# Altium PCB Power_Ctrl_Board_PCB.PcbDoc (part 1 of 2)
Units mil, origin at the board's own origin, x right, y up, seen from the top; angles counter-clockwise.
Board outline 6299.21 x 3937.01 mil, 4 copper layers (Top Layer, GND, +12, Bottom Layer), stack 23.756 mil thick; 118 components, 80 nets, 423 pads, 36 vias.
Unrouted connection lines stored in the file: 206.
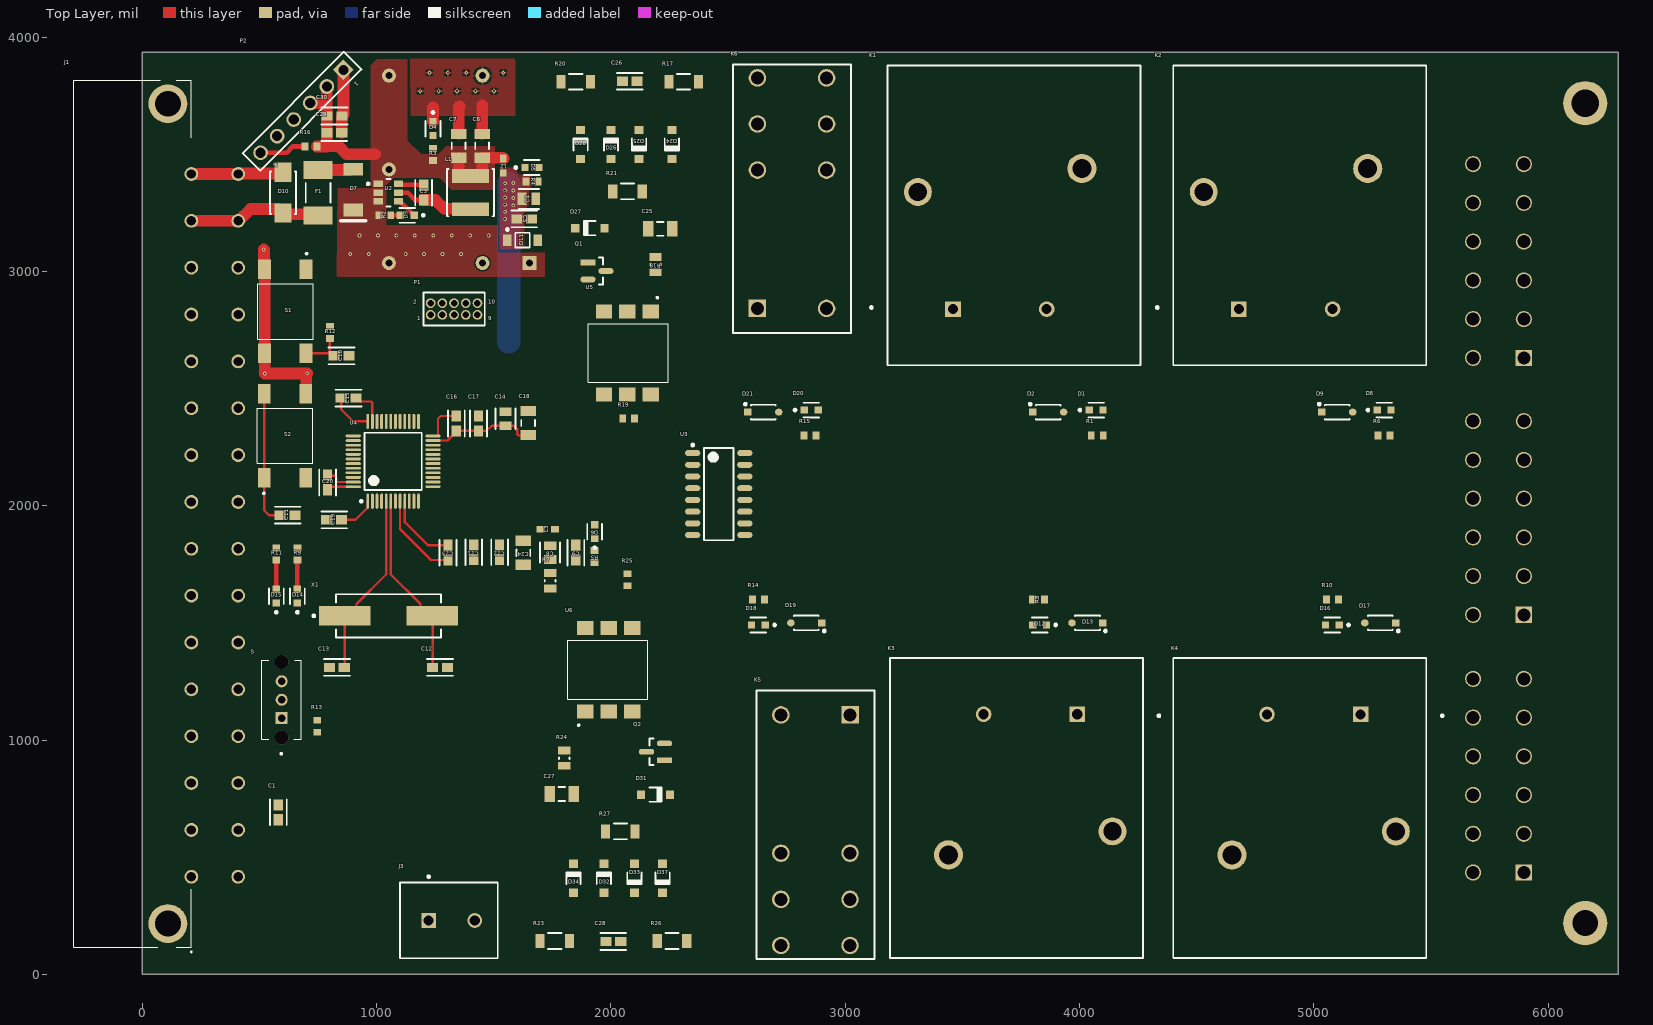
[diagram p0: Top Layer view]
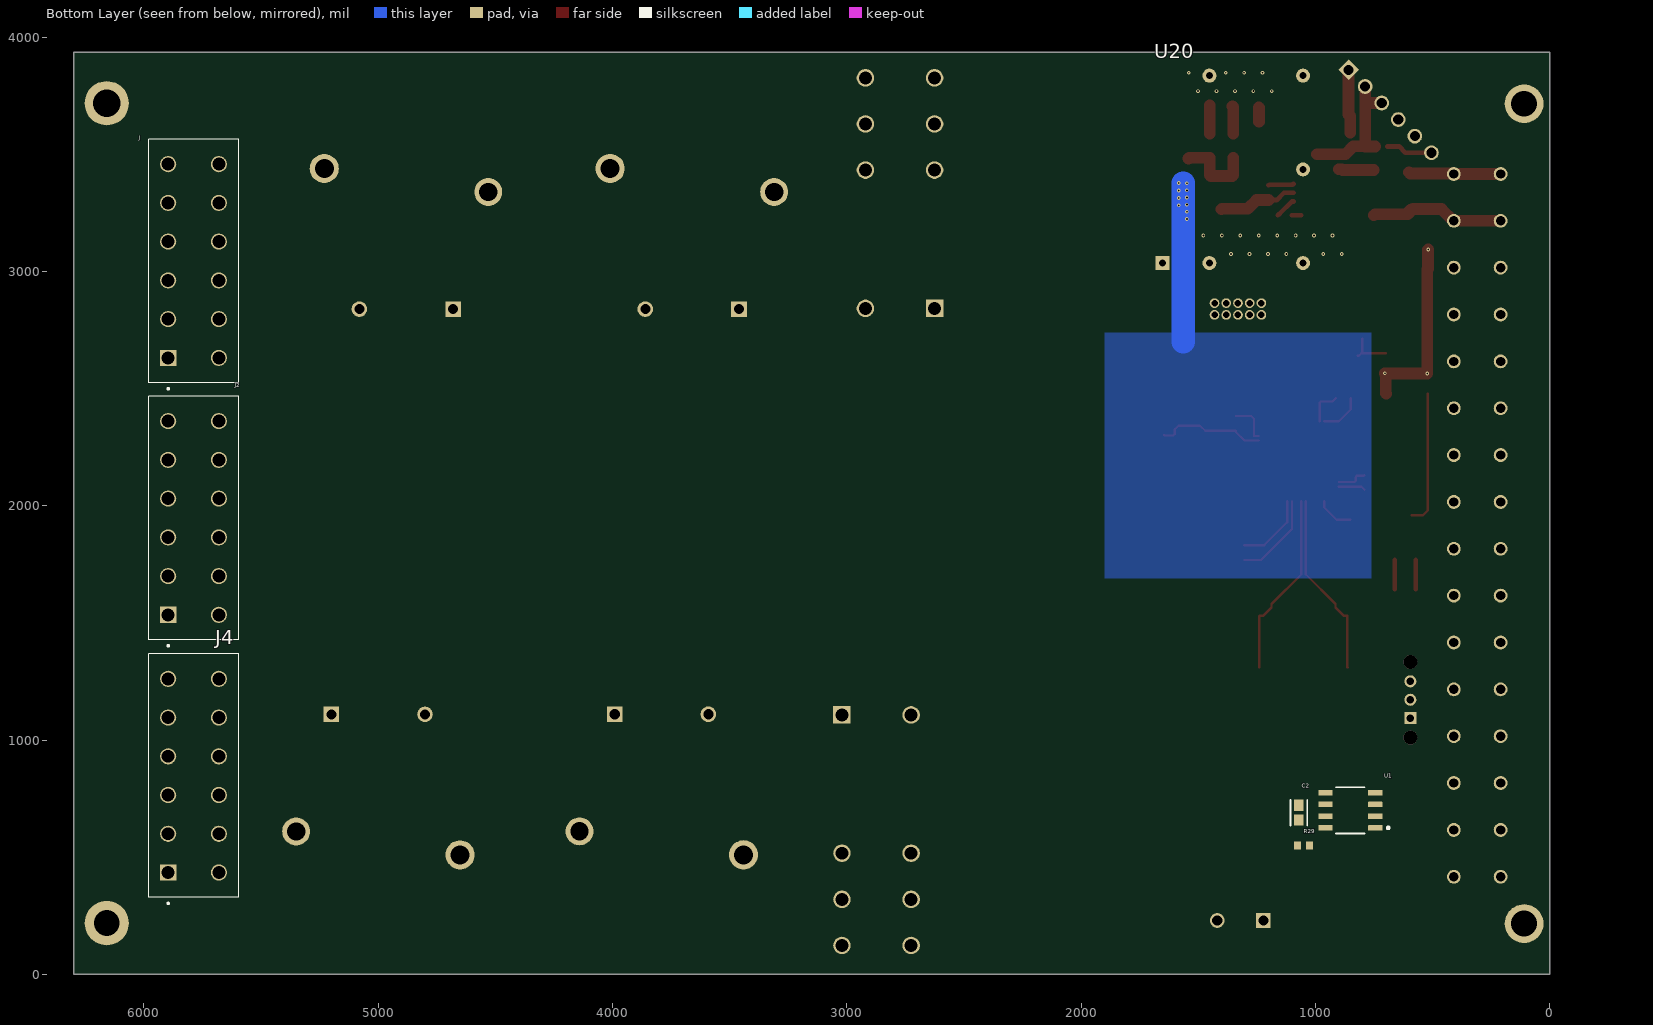
[diagram p1: Bottom Layer view, seen from below]
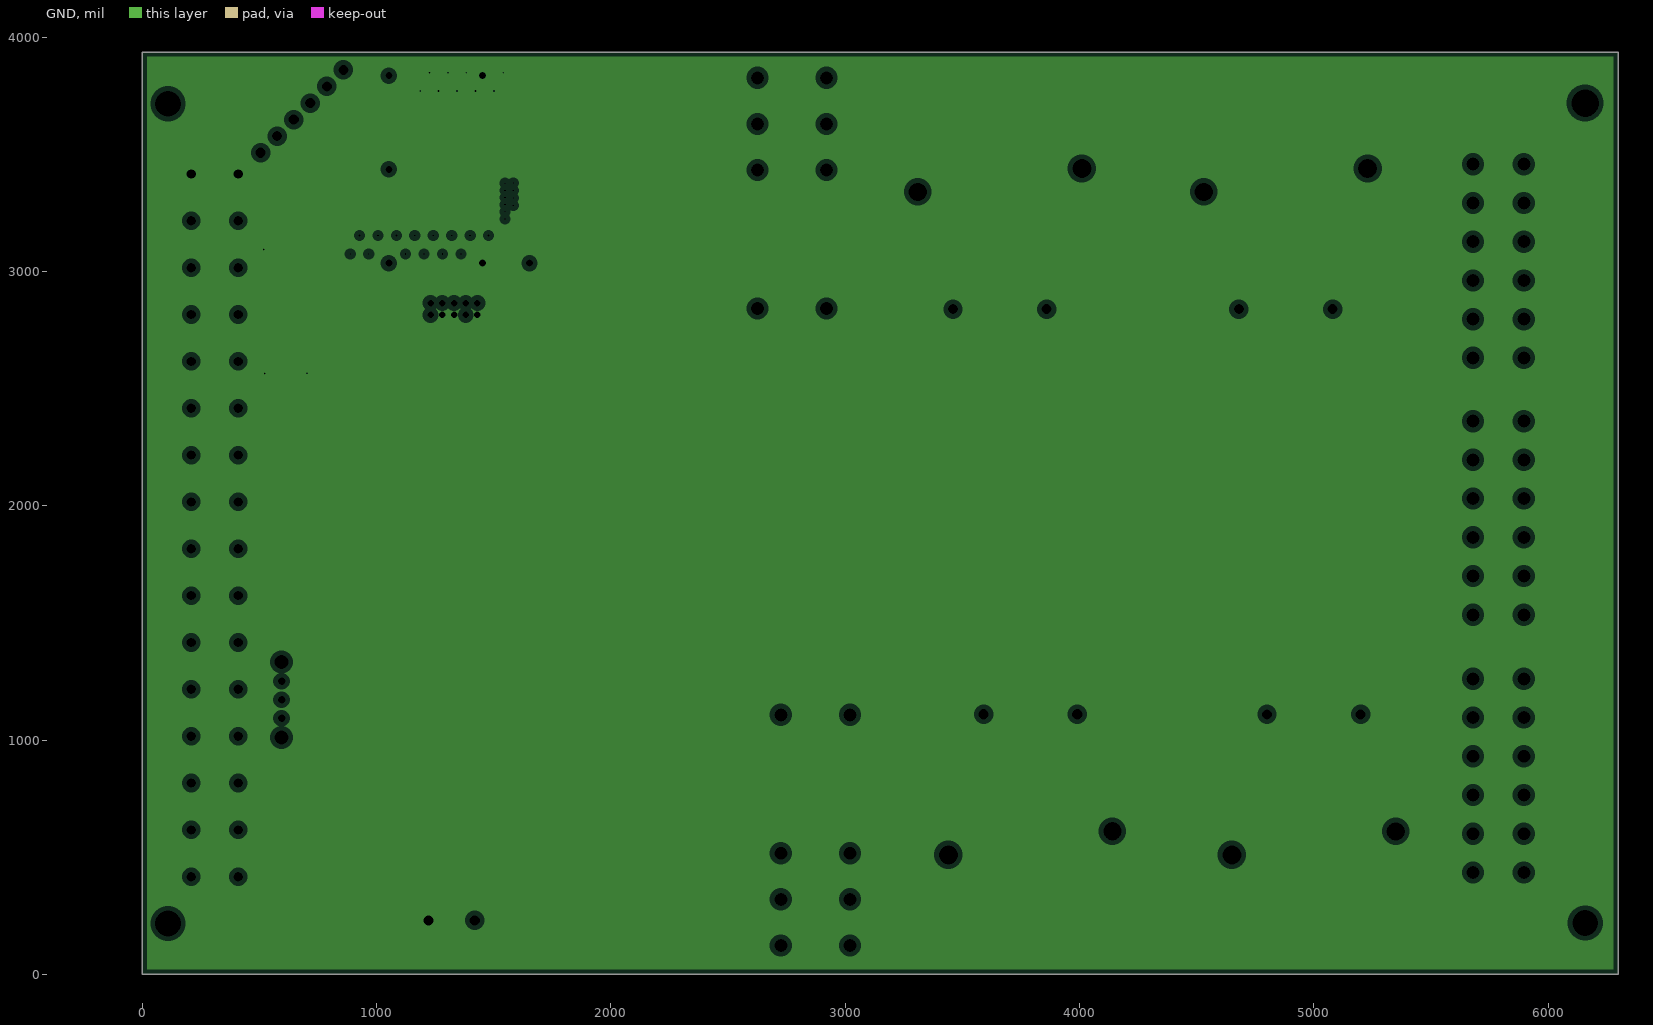
[diagram p2: GND, clearances drawn from the general rule]
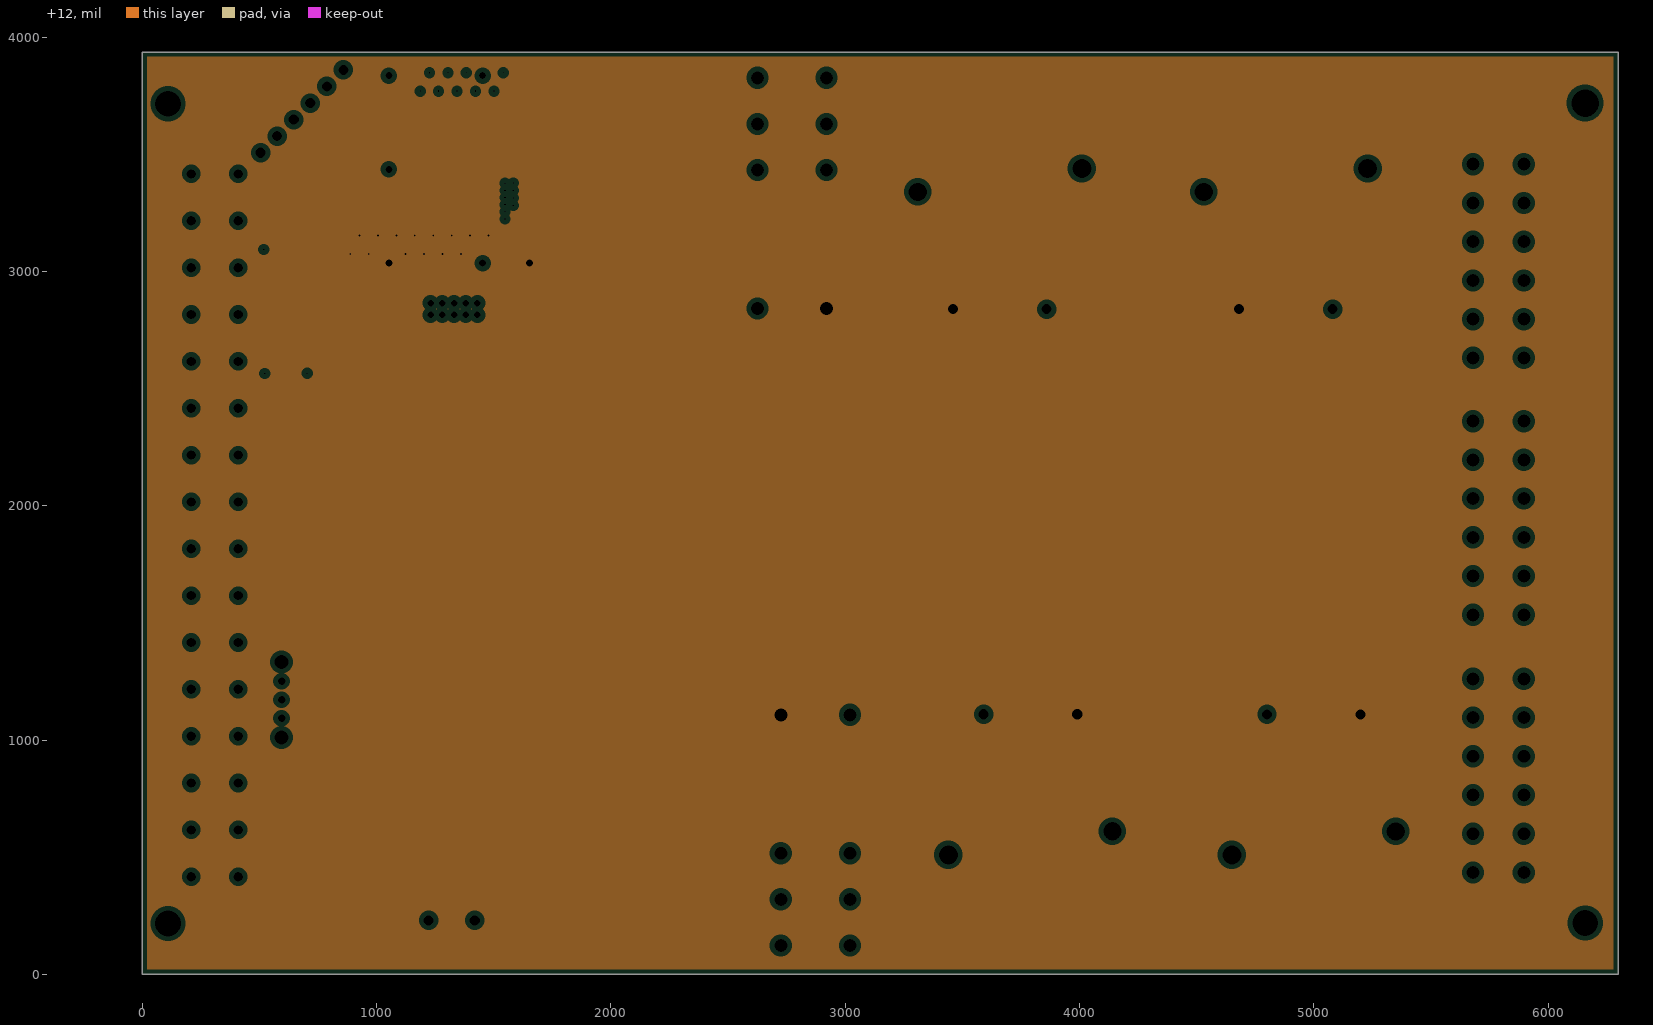
[diagram p3: +12, clearances drawn from the general rule]

## Layer stack, top to bottom
Top Solder: solder mask 0.4, Solder Resist, Dk 3.5
Top Layer: signal copper 1.4
Dielectric 2: prepreg 2.8, PP-006, Dk 4.1
GND: plane copper 1.378, net GND
Dielectric 1: dielectric 12.6, FR-4, Dk 4.8
+12: plane copper 1.378, net +12
Dielectric 3: prepreg 2.8, PP-006, Dk 4.1
Bottom Layer: signal copper 1.4
Bottom Solder: solder mask 0.4, Solder Resist, Dk 3.5

## Board outline
0,0 6299.21,0 6299.21,3937.01 0,3937.01

## Design rules (kind name [scope] priority, off if disabled: settings)
Clearance [All] p1: gap=5 ignorepadtopadclearanceinfootprint=TRUE
PlaneClearance [All] p1: clearance=20
PlaneConnect [All] p1: planeconnectstyle=Relief reliefexpansion=20 reliefentries=4 reliefconductorwidth=10 reliefairgap=10
PolygonConnect PolygonConnect_5 [All vs IsNamedPolygon('DVCC_L01_P005')] p1: connectstyle=Direct reliefconductorwidth=10 reliefentries=4 polygonreliefangle="90 Angle" airgapwidth=10
PolygonConnect PolygonConnect_4 [All vs IsNamedPolygon('+3.3_L01_P002')] p2: connectstyle=Direct reliefconductorwidth=10 reliefentries=4 polygonreliefangle="90 Angle" airgapwidth=10
PolygonConnect PolygonConnect_3 [All vs IsNamedPolygon('+12_L01_P000')] p3: connectstyle=Direct reliefconductorwidth=10 reliefentries=4 polygonreliefangle="90 Angle" airgapwidth=10
PolygonConnect PolygonConnect_2 [All vs IsNamedPolygon('+12_L01_P000')] p4: connectstyle=Relief reliefconductorwidth=10 reliefentries=4 polygonreliefangle="90 Angle" airgapwidth=10
PolygonConnect PolygonConnect_1 [All vs IsNamedPolygon('+12_L01_P000')] p5: connectstyle=Direct reliefconductorwidth=10 reliefentries=4 polygonreliefangle="90 Angle" airgapwidth=10
PolygonConnect [All] p6: connectstyle=Relief reliefconductorwidth=10 reliefentries=4 polygonreliefangle="90 Angle" airgapwidth=10
RoutingVias [All] p1: holewidth=7.87 width=15.75 viastyle="Through Hole" minholewidth=7.87 minwidth=15.75 maxholewidth=28 maxwidth=50
SilkToSilkClearance [All] p1 off: silktosilkclearance=10
SolderMaskExpansion [All] p1: expansion=4 istentingtop=FALSE
Width [All] p1: maxlimit=100 minlimit=6 preferedwidth=25 minimp=50.000000 maximp=50.000000 favimp=50.000000
27 further rules are at their usual default settings.

## Components (designator, comment, footprint, x,y, rotation, side; value= is the part's Value field where it differs from the comment)
C1 "GRM188R60J106ME47D" FP-GRM188-0_1-e0_2_0_55-IPC_A 580,691.57 r90 top
C2 "GRM188R60J106ME47D" FP-GRM188-0_1-e0_2_0_55-IPC_A 1070,690 r90 bottom
C3 "0.1uF, 50V, 0603, X7R" FP-GRM188-0_1-e0_2_0_55-IPC_A 1200,3336.61 r270 top
C4 "4.7uF, 50V, 0805, X5R" FP-C0805C-DG-MFG 1649.53,3310 r0 top value=10uF
C5 "0.1uF, 50V, 0603, X7R" FP-GRM188-0_1-e0_2_0_55-IPC_A 1629.6,3224.48 r0 top
C6 "22uF, 10V, 1206, X7R" AVX-1206-2_L 1450,3536.61 r270 top
C7 "22uF, 10V, 1206, X7R" AVX-1206-2_L 1350,3536.61 r270 top
C8 "4.7uF, 50V, 0805, X5R" FP-C0805C-DG-MFG 1740,1800 r270 top value=10uF
C9 "0.1uF, 50V, 0603, X7R" FP-GRM188-0_1-e0_2_0_55-IPC_A 1850,1800 r270 top
C10 "0.1uF, 50V, 0603, X7R" FP-GRM188-0_1-e0_2_0_55-IPC_A 850,2640 r0 top
C11 "0.1uF, 50V, 0603, X7R" FP-GRM188-0_1-e0_2_0_55-IPC_A 620,1960 r0 top
C12 "20pF, 50V, 0603, C0G/NPO" FP-GRM188-0_1-e0_2_0_55-IPC_A 1270,1310 r0 top
C13 "20pF, 50V, 0603, C0G/NPO" FP-GRM188-0_1-e0_2_0_55-IPC_A 830,1310 r180 top
C14 "4.7uF, 50V, 0805, X5R" FP-C0805C-DG-MFG 1549.68,2371.49 r270 top value=10uF
C15 "0.1uF, 50V, 0603, X7R" FP-GRM188-0_1-e0_2_0_55-IPC_A 880,2460 r0 top
C16 "0.1uF, 50V, 0603, X7R" FP-GRM188-0_1-e0_2_0_55-IPC_A 1340,2351.57 r270 top
C17 "1uF, 50V, 0603, X7R" FP-GRM188-0_1-e0_2_0_55-IPC_A 1434.37,2351.57 r270 top
C18 "10uF, 50V, 1206, X7R" AVX-1206-2_L 1646.34,2353.71 r90 top
C19 "0.1uF, 50V, 0603, X7R" FP-GRM188-0_1-e0_2_0_55-IPC_A 818.43,1940 r180 top
C20 "0.1uF, 50V, 0603, X7R" FP-GRM188-0_1-e0_2_0_55-IPC_A 790,2100 r90 top
C21 "0.1uF, 50V, 0603, X7R" FP-GRM188-0_1-e0_2_0_55-IPC_A 1414.25,1801.57 r270 top
C22 "1uF, 50V, 0603, X7R" FP-GRM188-0_1-e0_2_0_55-IPC_A 1524.25,1801.57 r270 top
C23 "10nF, 50V, 0603, X7R" FP-GRM188-0_1-e0_2_0_55-IPC_A 1304.25,1800 r270 top
C24 "10uF, 50V, 1206, X7R" AVX-1206-2_L 1625.89,1799.43 r90 top
C25 "10uF, 50V, 1206, X7R" AVX-1206-2_L 2210,3182.21 r180 top
C26 "1000pF, 50V, 0603, X7R" FP-GRM188-0_1-e0_2_0_55-IPC_A 2080,3812.21 r180 top
C27 "10uF, 50V, 1206, X7R" AVX-1206-2_L 1790,770 r0 top
C28 "1000pF, 50V, 0603, X7R" FP-GRM188-0_1-e0_2_0_55-IPC_A 2010,140 r0 top
C29 "22uF, 10V, 1206, X7R" FP-GRM188-0_1-e0_2_0_55-IPC_A 819,3593 r0 top
C30 "0.1uF, 50V, 0603, X7R" FP-GRM188-0_1-e0_2_0_55-IPC_A 820,3664 r0 top
D1 "LED" FP-LTST-C191TBKT-MFG 4070.63,2408.7 r0 top
D2 "MBR0520LT1G" FP-425-04-IPC_C 3866.14,2400 r0 top
D3 "LTST-C191TBKT" FP-LTST-C191TBKT-MFG 1130,3240 r180 top
D4 "LTST-C191TBKT" FP-LTST-C191TBKT-MFG 1240,3610 r270 top
D5 "LTST-C191TBKT" FP-LTST-C191TBKT-MFG 1662.3,3443.87 r0 top
D6 "LTST-C191TBKT" FP-LTST-C191TBKT-MFG 1930,1890 r90 top
D7 "60V, 5A" NXP-SOD128_V 900,3350 r270 top
D8 "LED" FP-LTST-C191TBKT-MFG 5300,2408.7 r0 top
D9 "MBR0520LT1G" FP-425-04-IPC_C 5100,2400 r0 top
D10 "Littelfuse TPSMB33CA" FP-SMAJ-CA-MFG 600,3336.61 r90 top
D11 "3.9V" ONSC-SOD-123-2-425-04_V 1622.3,3133.87 r0 top
D12 "LED" FP-LTST-C191TBKT-MFG 3829.37,1491.3 r180 top
D13 "MBR0520LT1G" FP-425-04-IPC_C 4033.86,1500 r180 top
D14 "LTST-C191TBKT" FP-LTST-C191TBKT-MFG 661.3,1614.45 r90 top
D15 "LTST-C191TBKT" FP-LTST-C191TBKT-MFG 571.3,1614.45 r90 top
D16 "LED" FP-LTST-C191TBKT-MFG 5079.37,1491.3 r180 top
D17 "MBR0520LT1G" FP-425-04-IPC_C 5283.86,1500 r180 top
D18 "LED" FP-LTST-C191TBKT-MFG 2629.37,1491.3 r180 top
D19 "MBR0520LT1G" FP-425-04-IPC_C 2833.86,1500 r180 top
D20 "LED" FP-LTST-C191TBKT-MFG 2854.49,2408.7 r0 top
D21 "MBR0520LT1G" FP-425-04-IPC_C 2650,2400 r0 top
D24 "1N4148W-7-F" DIOD-SOD123-2_V 2260,3542.21 r270 top
D25 "1N4148W-7-F" DIOD-SOD123-2_V 2120,3542.21 r270 top
D26 "1N4148W-7-F" DIOD-SOD123-2_V 2000,3542.21 r90 top
D27 "1N4148W-7-F" DIOD-SOD123-2_V 1910,3185.22 r180 top
D28 "1N4148W-7-F" DIOD-SOD123-2_V 1870,3542.21 r90 top
D31 "1N4148W-7-F" DIOD-SOD123-2_V 2190,766.98 r0 top
D32 "1N4148W-7-F" DIOD-SOD123-2_V 1970,410 r90 top
D33 "1N4148W-7-F" DIOD-SOD123-2_V 2100,410 r270 top
D34 "1N4148W-7-F" DIOD-SOD123-2_V 1840,410 r90 top
D37 "1N4148W-7-F" DIOD-SOD123-2_V 2220,410 r270 top
F1 "3A" LFUS-45X_V 750,3336.61 r90 top
J "12MOLEX 39-30-0120, do not populate" TE_1-1586038-2 5896.54,2631.42 r90 bottom
J1 "86094327113748ELF" 86094327113748ELF 208.66,416.54 r270 top
J2 "MOLEX 39-30-0120, Spare Relays" TE_1-1586038-2 5896.54,1534.65 r90 bottom
J3 "282836-2" TECO-282836-2_V 1320,230 r0 top
J4 "12MOLEX 39-30-0120, do not populate" TE_1-1586038-2 5896.54,434.65 r90 bottom
K1 "T9AS1D22-12" FP-T9AS1D22-12-MFG 3720,3240 r0 top
K2 "T9AS1D22-12" FP-T9AS1D22-12-MFG 4940.28,3240 r0 top
K3 "T9AS1D22-12" FP-T9AS1D22-12-MFG 3730.32,710 r180 top
K4 "T9AS1D22-12" FP-T9AS1D22-12-MFG 4940.28,709.8 r180 top
K5 "ALZ11B12" PNSC-LZ-8-2880x1250x1570_V 3020.32,1107.44 r270 top
K6 "ALZ11B12" PNSC-LZ-8-2880x1250x1570_V 2625.04,2842.56 r90 top
L1 "PowerCoil" FP-NRS5030-H_3_0-MFG 1400,3336.61 r90 top
L2 "1k, 0603" SMD-0603 1541,3452 r270 top
L3 "1k, 0603" SMD-0603 1730,1900 r0 top
P1 "62201021121" 62201021121 1330,2840 r0 top
P2 "61300611121" 61300611121 681,3684 r225 top
Q1 "MMBT3904-7-F" FP-SOT23-IPC_A 1940,3002.21 r0 top
Q2 "MMBT3904-7-F" FP-SOT23-IPC_A 2190,950 r180 top
R1 "4.7k, 5%, 0603, 1/10W" RESC1609X55X30LL15T15 4075.59,2300 r180 top
R2 "4.7k, 5%, 0603, 1/10W" RESC1609X55X30LL15T15 1034.41,3240 r180 top
R3 "4.7k, 5%, 0603, 1/10W" RESC1609X55X30LL15T15 1240,3500 r270 top
R4 "4.7k, 5%, 0603, 1/10W" RESC1609X55X30LL15T15 1662.3,3383.87 r180 top
R5 "4.7k, 5%, 0603, 1/10W" RESC1609X55X30LL15T15 1930,1784.41 r90 top
R6 "4.7k, 5%, 0603, 1/10W" RESC1609X55X30LL15T15 5300,2300 r180 top
R7 "0, ?, 0805, 1/8W" RESC2013X50X30LL20T20 1740,1680 r90 top
R8 "4.7k, 5%, 0603, 1/10W" RESC1609X55X30LL15T15 3825.59,1600 r0 top
R9 "4.7k, 5%, 0603, 1/10W" RESC1609X55X30LL15T15 661.3,1794.45 r90 top
R10 "4.7k, 5%, 0603, 1/10W" RESC1609X55X30LL15T15 5080,1600 r0 top
R11 "4.7k, 5%, 0603, 1/10W" RESC1609X55X30LL15T15 571.3,1794.45 r90 top
R12 "4.7k, 5%, 0603, 1/10W" RESC1609X55X30LL15T15 800,2740 r90 top
R13 "4.7k, 5%, 0603, 1/10W" RESC1609X55X30LL15T15 746,1059 r90 top
R14 "4.7k, 5%, 0603, 1/10W" RESC1609X55X30LL15T15 2630,1600 r0 top
R15 "4.7k, 5%, 0603, 1/10W" RESC1609X55X30LL15T15 2850,2300 r180 top
R16 "4.7k, 5%, 0603, 1/10W" RESC1609X55X30LL15T15 718.59,3534 r0 top
R17 "220k, 1%, 1206, 1/4W" FP-RC1206-MFG 2310,3810 r180 top value=0Ω
R18 "1k, 5%, 0805, 1/8W" RESC2013X50X30LL20T20 2190,3029.7 r270 top
R19 "4.7k, 5%, 0603, 1/10W" RESC1609X55X30LL15T15 2075.59,2372.21 r180 top
R20 "220k, 1%, 1206, 1/4W" FP-RC1206-MFG 1850,3810 r0 top value=0Ω
R21 "22k, 1%, 1206, 1/4W" FP-RC1206-MFG 2070,3342.21 r0 top value=0Ω
R23 "220k, 1%, 1206, 1/4W" FP-RC1206-MFG 1760,142.21 r0 top value=0Ω
R24 "1k, 5%, 0805, 1/8W" RESC2013X50X30LL20T20 1800,922.5 r90 top
R25 "4.7k, 5%, 0603, 1/10W" RESC1609X55X30LL15T15 2070,1684.41 r90 top
R26 "220k, 1%, 1206, 1/4W" FP-RC1206-MFG 2260,142.21 r180 top value=0Ω
R27 "22k, 1%, 1206, 1/4W" FP-RC1206-MFG 2040,610 r180 top value=0Ω
R29 "4.7k, 5%, 0603, 1/10W" RESC1609X55X30LL15T15 1050,550 r0 bottom
S "OS102011MS2QN1" SW_OS102011MS2QN1 594,1172 r90 top
S1 "3-1437566-8" SW_3-1437566-8 610,2830 r270 top
S2 "3-1437566-8" SW_3-1437566-8 608.58,2299.13 r90 top
U1 "ISO1540DR" FP-D0008A-MFG 850,700 r0 bottom
U2 "AP63203WU-7" FP-TSOT26-MFG 1050,3336.61 r0 top
U3 "ULN2003AD" D0016A_M 2460,2050 r0 top
U4 "STM32F334C4T6" STM-LQFP48_M 1070,2190 r90 top
U5 "4N35SR2M" OPTO_4N35SM 2070,2652.21 r270 top
U6 "4N35SR2M" OPTO_4N35SM 1990,1300 r90 top
U20 "3.3V DC_DC Buck" PCBComponent_1 1052,3036 r90 bottom
X1 "Crystal" ABRA-ABLS2-2_V 1050,1530 r0 top

## Footprints (in the part's own frame and the unit in brackets; to place one, negate y for a bottom-side part, rotate by r counter-clockwise, add the part's x,y. Pads: shape width x height; smd on the part's side, far side on the other; paste and mask are expansions set on the pad)
61300611121 [mm] "Pin Header, pitch 2.54 mm, THT, Vertical, single row, 6p"
  rect 1.6x1.6 hole 1.1: 1(-6.35,0)
  round 1.6 hole 1.1: 2(-3.81,0) 3(-1.27,0) 4(1.27,0) 5(3.81,0) 6(6.35,0)
  silkscreen extent -7.77,-1.34 7.77,1.35, body extent -7.62,-1.27 7.62,1.27, height 8.57
62201021121 [mm] "Pin Header, pitch 1.27 mm, THT, Vertical, dual row, 10p"
  round 1.05 hole 0.7: 1(-2.54,-0.635) 2(-2.54,0.635) 3(-1.27,-0.635) 4(-1.27,0.635) 5(0,-0.635) 6(0,0.635) 7(1.27,-0.635) 8(1.27,0.635) 9(2.54,-0.635) 10(2.54,0.635)
  silkscreen extent -3.32,-1.78 3.32,1.78, body extent -3.17,-1.7 3.18,1.7, height 5.33
86094327113748ELF [mm]
  round 1.5 hole 1: A1(0,0) A3(-5.08,0) A5(-10.16,0) A7(-15.24,0) A9(-20.32,0) A11(-25.4,0) A13(-30.48,0) A15(-35.56,0) A17(-40.64,0) A19(-45.72,0) A21(-50.8,0) A23(-55.88,0) A25(-60.96,0) A27(-66.04,0) A29(-71.12,0) A31(-76.2,0) C1(0,5.08) C3(-5.08,5.08) C5(-10.16,5.08) C7(-15.24,5.08) C9(-20.32,5.08) C11(-25.4,5.08) C13(-30.48,5.08) C15(-35.56,5.08) C17(-40.64,5.08) C19(-45.72,5.08) C21(-50.8,5.08) C23(-55.88,5.08) C25(-60.96,5.08) C27(-66.04,5.08) C29(-71.12,5.08) C31(-76.2,5.08)
  round 4.2 hole 2.8: MH1(-83.82,-2.54) MH2(5.08,-2.54)
  silkscreen extent -86.37,-12.74 8.2,0.05, body extent -86.37,-12.74 7.63,5.48, height 11.2
ABRA-ABLS2-2_V [mm] "SMD, 2-Leads, Body 11.4x4.7mm, Height 3.3mm"
  rect 5.6x2.1 smd: 1(-4.75,0) 2(4.75,0)
  silkscreen extent -8.22,-2.35 5.7,2.35, body extent -5.7,-2.35 5.7,2.35, height 3.3
AVX-1206-2_L [mm] "SMD, 2-Leads, Body 3.4x1.8mm, IPC High Density"
  rect 1.1x1.7 smd: 1(-1.3,0) 2(1.3,0)
  silkscreen extent -0.35,-0.75 0.35,0.75, body extent -1.7,-0.9 1.7,0.9, height 1.52
D0016A_M [mm] "SOIC, 16-Leads, Body 10x4mm, Pitch 1.27mm, IPC Low Density"
  oval 1.65x0.65 smd: 1(-2.825,4.445) 2(-2.825,3.175) 3(-2.825,1.905) 4(-2.825,0.635) 5(-2.825,-0.635) 6(-2.825,-1.905) 7(-2.825,-3.175) 8(-2.825,-4.445) 9(2.825,-4.445) 10(2.825,-3.175) 11(2.825,-1.905) 12(2.825,-0.635) 13(2.825,0.635) 14(2.825,1.905) 15(2.825,3.175) 16(2.825,4.445)
  silkscreen extent -2.95,-5 1.6,5.44, body extent -3,-4.95 3,4.95, height 1.59
DIOD-SOD123-2_V [mm] "SOD123, 2-Leads, Body 2.7x1.55mm, Height 1.45mm"
  rect 0.9x0.95 smd: 1(-1.575,0) 2(1.575,0)
  silkscreen extent -0.64,-0.83 0.64,0.77, body extent -1.35,-0.77 1.35,0.77, height 1.45
FP-425-04-IPC_C [mm]
  rect 0.808x0.742 smd paste+0 mask+0: 1(-1.68,0)
  rrect100% 0.808x0.742 smd paste+0 mask+0: 2(1.68,0)
  silkscreen extent -2.07,-0.8 1.35,1, body extent -2.18,-0.9 2.18,0.9, height 0.25
FP-C0805C-DG-MFG [mm]
  rect 0.95x1.35 smd paste+0 mask+0: 1(-0.75,0) 2(0.75,0)
  silkscreen extent -1.11,-1.08 1.1,1.07, body extent -1.4,-0.85 1.4,0.85, height 0.25
FP-D0008A-MFG [mm]
  rrect17% 1.55x0.6 smd paste+0 mask+0: 1(-2.7,1.905) 2(-2.7,0.635) 3(-2.7,-0.635) 4(-2.7,-1.905) 5(2.7,-1.905) 6(2.7,-0.635) 7(2.7,0.635) 8(2.7,1.905)
  silkscreen extent -4.22,-2.5 1.55,2.5, body extent -3,-2.45 3,2.45, height 1.75
FP-GRM188-0_1-e0_2_0_55-IPC_A [mil]
  rect 47.57x39.85 smd paste+0 mask+0: 1(-31.57,0) 2(31.57,0)
  silkscreen extent -55,-36 55,36, body extent -75,-40 75,40, height 10
FP-LTST-C191TBKT-MFG [mm]
  rect 0.8x0.8 smd paste+0 mask+0: 1(-0.75,0) 2(0.75,0)
  silkscreen extent -1.87,-0.8 0.85,0.8, body extent -1.25,-0.55 1.25,0.55, height 0.25
FP-NRS5030-H_3_0-MFG [mm]
  rect 1.5x4 smd paste+0 mask+0: 1(-1.8,0) 2(1.8,0)
  silkscreen extent -2.55,-2.55 2.55,2.55, body extent -2.65,-2.65 2.65,2.65, height 0.25
FP-RC1206-MFG [mm]
  rect 1x1.5 smd paste+0 mask+0: 1(-1.6,0) 2(1.6,0)
  silkscreen extent -0.72,-0.85 0.72,0.85, body extent -2.2,-0.95 2.2,0.95, height 0.25
FP-SMAJ-CA-MFG [mm]
  rect 2.1x1.8 smd paste+0 mask+0: 1(-2.2,0) 2(2.2,0)
  silkscreen extent -2.3,-1.4 2.3,1.4, body extent -3.35,-1.5 3.35,1.5, height 0.25
FP-SOT23-IPC_A [mm]
  rect 1.659x0.627 smd paste+0 mask+0: 1(-0.977,0.915)
  rrect100% 1.659x0.627 smd paste+0 mask+0: 2(-0.977,-0.915) 3(0.977,0)
  silkscreen extent 0.23,-1.45 0.65,1.45, body extent -2.31,-1.95 2.31,1.95, height 0.25
FP-T9AS1D22-12-MFG [mm]
  rect 1.69x1.69 hole 1.09 paste-1000 mask+0: A1(-6.605,-10.165)
  round 1.69 hole 1.09 paste-1000 mask+0: A2(3.555,-10.165)
  round 3.16 hole 2.06 paste-1000 mask+0: B1(7.365,5.075)
  round 3.03 hole 1.98 paste-1000 mask+0: B2(-10.415,2.535)
  silkscreen extent -15.57,-16.25 13.71,16.25, body extent -13.81,-16.35 13.81,16.35, height 0.25
FP-TSOT26-MFG [mm]
  rect 1x0.7 smd paste+0 mask+0: 1(-1.099,0.95) 2(-1.099,0) 3(-1.099,-0.95) 4(1.099,-0.95) 5(1.099,0) 6(1.099,0.95)
  silkscreen extent -2.32,-1.5 0.22,1.5, body extent -1.7,-1.6 1.7,1.6, height 0.25
LFUS-45X_V [mm] "SMD, 2-Leads, Body 6.1x2.69mm"
  rect 1.96x3.15 smd: 1(-2.455,0) 2(2.455,0)
  silkscreen extent -1.07,-1.35 1.07,1.35, body extent -3.05,-1.34 3.05,1.34, height 2.94
NXP-SOD128_V [mm] "SOD128, 2-Leads, Body 2.7x4mm"
  rect 1.4x2.1 smd: 1(-2.2,0) 2(2.2,0)
  silkscreen extent 3.4,-1.35 3.4,1.35, body extent -2.35,-1.25 2.35,1.25, height 1.1
ONSC-SOD-123-2-425-04_V [mm] "SOD, 2-Leads, Body 2.69x1.6mm"
  rect 0.91x1.22 smd: 1(-1.635,0) 2(1.635,0)
  silkscreen extent -1.76,-0.8 0.78,1.28, body extent -1.35,-0.8 1.35,0.8, height 1.35
OPTO_4N35SM [mm]
  rect 1.52x1.78 smd: 1(-4.505,2.54) 2(-4.505,0) 3(-4.505,-2.54) 4(4.505,-2.54) 5(4.505,0) 6(4.505,2.54)
  silkscreen extent -6.1,-4.26 3.18,4.45
PCBComponent_1 [mil]
  rect 60x60 hole 30: 1(0,600)
  round 60 hole 30: 2(0,400) 3(0,0) 4(400,0) 5(800,0) 6(800,400)
PNSC-LZ-8-2880x1250x1570_V [mm] "LZ, 8-Leads, Body 28.8x12.5mm"
  rect 1.9x1.9 hole 1.4 mask+0.102: 1(0,0)
  round 1.9 hole 1.4 mask+0.102: 2(15,0) 3(20,0) 4(25,0) 5(25,-7.5) 6(20,-7.5) 7(15,-7.5) 8(0,-7.5)
  silkscreen extent -2.65,-10.15 26.45,2.65, body extent -2.65,-10.15 26.45,2.65, height 16
RESC1609X55X30LL15T15 [mm] "Chip Resistor, 2-Leads, Body 1.75x0.95mm, IPC High Density"
  rect 0.75x0.85 smd: 1(-0.65,0) 2(0.65,0)
  body extent -0.87,-0.48 0.87,0.48, height 0.55
RESC2013X50X30LL20T20 [mm] "Chip Resistor, 2-Leads, Body 2.00x1.25mm, IPC High Density"
  rect 0.85x1.35 smd: 1(-0.825,0) 2(0.825,0)
  silkscreen extent -0.1,-0.58 0.1,0.58, body extent -1.1,-0.72 1.1,0.72, height 0.5
SMD-0603 [mm] "Chip Inductor, 2-Leads, Body 1.6x0.8mm"
  rect 0.85x0.7 smd: 1(-0.775,0) 2(0.775,0)
  body extent -0.8,-0.4 0.8,0.4, height 0.79
STM-LQFP48_M [mm] "QFP, 48-Leads, Body 7x7mm, Pitch 0.5mm, IPC Low Density"
  oval 1.65x0.3 smd: 1(-4.325,2.75) 2(-4.325,2.25) 3(-4.325,1.75) 4(-4.325,1.25) 5(-4.325,0.75) 6(-4.325,0.25) 7(-4.325,-0.25) 8(-4.325,-0.75) 9(-4.325,-1.25) 10(-4.325,-1.75) 11(-4.325,-2.25) 12(-4.325,-2.75) 25(4.325,-2.75) 26(4.325,-2.25) 27(4.325,-1.75) 28(4.325,-1.25) 29(4.325,-0.75) 30(4.325,-0.25) 31(4.325,0.25) 32(4.325,0.75) 33(4.325,1.25) 34(4.325,1.75) 35(4.325,2.25) 36(4.325,2.75)
  oval 0.3x1.65 smd: 13(-2.75,-4.325) 14(-2.25,-4.325) 15(-1.75,-4.325) 16(-1.25,-4.325) 17(-0.75,-4.325) 18(-0.25,-4.325) 19(0.25,-4.325) 20(0.75,-4.325) 21(1.25,-4.325) 22(1.75,-4.325) 23(2.25,-4.325) 24(2.75,-4.325) 37(2.75,4.325) 38(2.25,4.325) 39(1.75,4.325) 40(1.25,4.325) 41(0.75,4.325) 42(0.25,4.325) 43(-0.25,4.325) 44(-0.75,4.325) 45(-1.25,4.325) 46(-1.75,4.325) 47(-2.25,4.325) 48(-2.75,4.325)
  silkscreen extent -4.45,-3.1 3.1,3.57, body extent -3.5,-3.5 3.5,3.5, height 1.6
SW_3-1437566-8 [mm]
  rect 2.1x1.4 smd: 1(-4.55,2.25) 2(4.55,2.25) 3(-4.55,-2.25) 4(4.55,-2.25)
  silkscreen extent -6.35,-3 3,3
SW_OS102011MS2QN1 [mm]
  rect 1.308x1.308 hole 0.8: 1(-2,0)
  round 1.308 hole 0.8: 2(0,0) 3(2,0)
  round 1.5 hole 1.5 unplated: ""(-4.1,0) ""(4.1,0)
  silkscreen extent -5.95,-2.15 4.3,2.15
TE_1-1586038-2 [mm]
  rect 1.75x1.75 hole 1.4: 1(0,0)
  round 1.75 hole 1.4: 2(0,-5.5) 3(4.2,0) 4(4.2,-5.5) 5(8.4,0) 6(8.4,-5.5) 7(12.6,0) 8(12.6,-5.5) 9(16.8,0) 10(16.8,-5.5) 11(21,0) 12(21,-5.5)
  silkscreen extent -3.45,-7.63 23.7,2.12
TECO-282836-2_V [mm] "Female Header, Pitch 5mm, 1 x 2 Position, Height 10mm"
  rect 1.6x1.6 hole 1.1: 1(-2.5,0)
  round 1.6 hole 1.1: 2(2.5,0)
  silkscreen extent -5.6,-4.1 5,4.87, body extent -5.6,-4.1 5,4.1, height 10

## Part data
C1 C2 C3 C5 C9 C10 C11 C12 C13 C15 C16 C17 C19 C20 C21 C22 C23 C26 C28 C29 C30: library part CMP-2006-02792-2, "Chip Multilayer Ceramic Capacitors for General Purpose, 0603, 10uF, X5R, 15%, 20%, 6.3V", Capacitance=10uF, Case Code (Imperial)=0603, Case Code (Metric)=1608, Dielectric=X5R, Max Operating Temperature=85°C, Min Operating Temperature=-55°C, Package Quantity=4000, Tolerance=20%, Voltage=6.3V, Case/Package=0603, Depth=0.8mm, Height=0.8mm, Lead Free="Lead Free", Length=1.6mm, Material=Ceramic, Mount="Surface Mount", Packaging="Tape and Reel", Radiation Hardening=No, REACH SVHC="No SVHC", Termination=SMD/SMT, Thickness=0.035inch, Voltage Rating=6.3V, Voltage Rating (DC)=6.3V, Width=0.031inch
C4 C8 C14: library part CMP-2007-03243-2, "CAP CER 10UF 10V X5R 0805", 3DS Part Number=220-00001, Capacitance=10uF, Manufacturer=Kemet, Manufacturer Part Number=C0805C106K8PACTU, Package=C0805C-DG, Temperature="-55°C to +85°C", Temperature Characteristic=X5R, Temperature Coefficient=15%, Temperature Range High=+85°C, Temperature Range Low=-55°C, Tolerance=10%, Voltage=10V, Automotive=No, Category=Cap, ComponentLink2Description=Datasheet, ComponentLink2URL=https://content.kemet.com/datasheets/KEM_C1006_X5R_SMD.pdf, Device Class L1="Passive Components", Device Class L2=Capacitors, Device Class L3="Ceramic Capacitors", Digikey Description="CAP CER 10UF 10V X5R 0805", Height=1.4mm, Ipc Land Pattern Name=CAPC200125X125, Lead Free=Yes, Material=Ceramic, Mouser Description="CAP CER 10UF 10V X5R 0805", Octopart=https://octopart.com/c0805c106k8pactu-kemet-98697, RoHS=TRUE, Voltage Rating=10V
C6 C7 C18 C24 C25 C27: library part CMP-2000-05468-1, "Chip Capacitor, 1 nF, +/- 10%, -55 to 125 degC, 1206 (3216 Metric), RoHS, Tape and Reel", Capacitance=0.001uF, Case Size/Dimension=1206, Dielectric=X7R, Manufacturer=AVX, Package Description="2-Pin SMD, Body 3.4 x 1.8 mm", PartNumber=1206GC102KAT1A, Rated Voltage=2000V, Tolerance=10%, Tolerance (%)=±10%, Datasheet URL=https://datasheet.ciiva.com/11787/0900766b80ed4c37-11787781.pdf, Datasheet Version=11/2010, Manufacturer URL=http://www.avx.com/, Mounting Technology=SurfaceMount, Package Reference=1206, Voltage Rating DC=2000V
D1 D3 D4 D5 D6 D8 D12 D14 D15 D16 D18 D20: library part CMP-22017-000008-1, "LED BLUE CLEAR CHIP SMD", Case Code (Imperial)=0603, Case Code (Metric)=1608, Color=Blue, Forward Current=20mA, Forward Voltage=3.8V, Lens Color=Colorless, Max Operating Temperature=80°C, Max Power Dissipation=75mW, Min Operating Temperature=-20°C, Package Quantity=1, Power Dissipation=76mW, Reverse Voltage=5V, Case/Package=0603, Depth=1.6mm, Dominant Wavelength=475nm, Height=0.55mm, Illumination Color=Blue, Lead Free="Lead Free", Length=0.8mm, Lens Style=Diffused, Lens Transparency=Clear, Luminous Intensity=180mcd, Mount="Surface Mount", Number of Elements=1, Number of LEDs=1, Number of Pins=2, Packaging="Tape and Reel", Radiation Hardening=No, Test Current=20mA, Viewing Angle=130°, Wavelength=468nm, Width=0.8mm
D2 D9 D13 D17 D19 D21: library part CMP-1055-00425-2, "DIODE SCHOTTKY 20V 500MA SOD123", Average Rectified Current=500mA, Case/Package=SOD-123-2, Forward Voltage=385mV, Max Forward Surge Current (Ifsm)=5.5A, Max Operating Temperature=125°C, Max Repetitive Reverse Voltage (Vrrm)=20V, Max Reverse Leakage Current=250uA, Min Operating Temperature=-65°C, Package Quantity=3000, Contact Plating=Tin, Current Rating=500mA, Element Configuration=Single, Forward Current=500mA, Height=1.12mm, Lead Free="Lead Free", Length=2.69mm, Max Reverse Voltage (DC)=20V, Max Surge Current=5.5A, Number of Pins=2, Output Current=500mA, Packaging="Tape and Reel", Peak Non-Repetitive Surge Current=5.5A, Peak Reverse Current=250uA, Polarity=Standard, Radiation Hardening=No, REACH SVHC="No SVHC", Termination=SMD/SMT, Voltage Rating (DC)=20V, Width=1.6mm
D7: library part CMP-2000-06906-1, "Schottky Barrier Rectifier, 3 A, 30 V, -55 to 150 degC, 2-Pin SOD128, RoHS, Tape and Reel", Capacitance @ Vr, F=470pF@1V,1MHz, Current - Average Rectified (Io)=3A, Current - Reverse Leakage @ Vr=5mA@30V, Manufacturer="NXP Semiconductors", Operating Temperature - Junction=150°C(Max), Package / Case=SOD-128, Package Description="2-Pin Plastic Surface-Mounted Package, Body 2.5 x 3.8 mm", Package Reference=SOD128, Package Version=02/2016, Standard Package=1, Voltage - DC Reverse (Vr) (Max)=30V, Voltage - Forward (Vf) (Max) @ If=360mV@3A, Category=DiscreteSemiconductorProducts, Datasheet URL=http://www.nxp.com/documents/data_sheet/PMEG3030EP.pdf, Datasheet Version="Rev. 01, 12/2009", Diode Type=Schottky, Family=Diodes,Rectifiers-Single, Manufacturer URL=http://www.nxp.com/, Mounting Technology=SurfaceMount, Mounting Type=SurfaceMount, Online Catalog=SchottkyDiode, Other Names=568-6761-6, Package URL=http://www.nxp.com/documents/outline_drawing/SOD128.pdf, Packaging=Digi-Reel®, PCN Packaging=LighterReels02/Jan/2014, Reverse Recovery Time (trr)=-, Series=-, Speed=FastRecovery=200mA(Io), Supplier Device Package=SOD-128
D10: library part CMP-08607-000027-1, "TVS DIODE 12V 19.9V DO214AC", Breakdown Voltage=13.3V, Clamping Voltage=19.9V, Manufacturer="Littelfuse Inc", Manufacturer Part Number=SMAJ12CA, Max Junction Temp=+150°C, Package=SMAJ-CA, Peak Pulse Current=20.1A, Peak Pulse Power=400W, Reverse Standoff Voltage=12V, Temperature="-65°C to +150°C", Temperature Range Low=-65°C, Automotive=No, Category=Diode, ComponentLink2Description=Datasheet, ComponentLink2URL=https://www.littelfuse.com/~/media/electronics/datasheets/tvs_diodes/littelfuse_tvs_diode_smaj_datasheet.pdf.pdf, Device Class L1="Circuit Protection", Device Class L2="TVS Diodes", Device Class L3=unset, Digikey Description="TVS DIODE 12V 19.9V DO214AC", Direction=Bidirectional, Height=2.29mm, Lead Free=Yes, Mouser Description="TVS Diodes - Transient Voltage Suppressors 12Vr 400W 20.1A 5% BiDirectional", Number Of Channels=1, Octopart=https://octopart.com/smaj12ca-littelfuse-349824, RoHS=TRUE, Temperature Range High=+150°C
D11: library part CMP-1060-00279-1, "Zener Voltage Regulator, 500 mW, 2-Pin SOD-123, Pb-Free, Tape and Reel", Manufacturer="On Semiconductor", PartNumber=MMSZ18T1G, ComponentLink1Description="Manufacturer URL", ComponentLink1URL=http://www.onsemi.com/, ComponentLink2Description=Datasheet, ComponentLink2URL=http://www.onsemi.com/pub_link/Collateral/MMSZ2V4T1-D.PDF, ComponentLink3Description="Package Specification", ComponentLink3URL=http://www.onsemi.com/pub_link/Collateral/425-04.PDF, DatasheetVersion="Rev. 11", Mounting Technology="Surface Mount", P Max (W)=0.5, PackageDescription="2-Pin SOD, Body 1.6 x 2.69 mm", PackageReference=SOD-123-2-425-04, PackageVersion="Rev. G, 10/2009", Packing="Tape and Reel", RoHS=Pb-Free
D24 D25 D26 D27 D28 D31 D32 D33 D34 D37: library part CMP-2000-04932-2, "Fast Switching Diode, 100 V, 0.15 A, -65 to 150 degC, 2-Pin?SOD123, RoHS, Tape and Reel", If - Forward Current=0.15A, Ir - Reverse Current=1uA, Manufacturer=DiodesIncorporated, Max Surge Current=2A, Maximum Operating Temperature=+150C, Minimum Operating Temperature=-65C, Operating Temperature Range=-65Cto+150C, Package / Case=SOD-123, Package Reference=SOD123-2, Peak Reverse Voltage=100V, Vf - Forward Voltage=1.25V, Brand=DiodesIncorporated, Configuration=Single, Datasheet URL=http://www.farnell.com/datasheets/1915529.pdf, Datasheet Version="Rev. 24-2, 10/2013", Factory Pack Quantity=3000, Height=1.25mm, Length=2.85mm, Manufacturer URL=http://www.diodes.com/, Mounting Style=SMD/SMT, Package URL=http://www.diodes.com/datasheets/ds18004.pdf, Packaging=Reel, Product=SwitchingDiodes, Product Category=Diodes-GeneralPurpose,Power,Switching, Recovery Time=4ns, RoHS=True, Series=1N4148, Type=SwitchingDiode, Unit Weight=0.000353oz, Width=1.7mm
F1: library part CMP-2000-05631-1, "Fuse, 125 V, 500 mA, -55 to 125 degC, 2-Pin SMD, RoHS, Tape and Reel", Current Rating=0.5A, Manufacturer=Littelfuse, Operating Temp Range=-55to+125°C, Package Description="2-Pin Surface Mount Device, Body 6.1 x 2.69 mm", Package Reference=45X, Working Voltage-Max=125V, Datasheet URL=http://www.littelfuse.com/products/fuses/surface-mount-fuses/nano-2-fuses/~/media/electronics/datasheets/fuses/littelfuse_fuse_451_453_datasheet.pdf.pdf, Datasheet Version=02/2016, Manufacturer URL=http://www.littelfuse.com/, Mounting Technology=SurfaceMount, Response Characteristic=VeryFastActing, Size=6.10x2.69mm
J J2 J4: library part 1-1586038-2, "Conn Power HDR 12 POS 4.2mm Solder ST Thru-Hole 12 Terminal 1 Port Tray", Package=None, Availability=Unavailable, MF="TE Connectivity", MP=1-1586038-2, Price=None, SnapEDA_Link=https://www.snapeda.com/parts/1-1586038-2/TE%20Connectivity%20AMP%20Connectors/view-part/2360872/?ref=snap
J1: "Connector", Manufacturer_Name=Amphenol, Mouser Part Number=649-869432713748ELF, Datasheet Link=https://cdn.amphenol-icc.com/media/wysiwyg/files/drawing/c-8609-2154.pdf, Height=11.1mm, Manufacturer_Part_Number=86094327113748ELF, Mouser Price/Stock=https://www.mouser.co.uk/ProductDetail/Amphenol-FCI/86094327113748ELF?qs=isxS6NDG2Tvinl2bB1GBQA%3D%3D
J3: library part CMP-1684-00017-1, "Female Header, Pitch 5 mm, 1 x 2 Position, Height 10 mm, Tail Length 3.5 mm, Rohs, Bulk", Color=Green, Current=13.5A, Manufacturer="TE Connectivity", Package Description="Female Header, Pitch 5 mm, 1 x 2 Position, Height 10 mm, Tail Length 3.5 mm", Package Reference=THD, Standard Package=300, Voltage=300V, 3D Model=282836-2.pdf, Category=Connectors,Interconnects, Clamp Material - Plating=Brass-NickelPlated, Contact Material - Plating=Brass-TinPlated, Datasheet URL=http://www.te.com.cn/commerce/DocumentDelivery/DDEController?Action=showdoc&DocId=Catalog+Section%7F1308389_EUROSTYLE_TERMINAL_BLOCKS%7F0607%7Fpdf%7FEnglish%7FENG_CS_1308389_EUROSTYLE_TERMINAL_BLOCKS_0607.pdf%7F282836-2, Dynamic Catalog=BuchananSeries, Family=TerminalBlocks-WiretoBoard, Featured Product=EurostyleTerminalBlockConnectors, Features=Interlocking(Side), Housing Material=Polyamide(PA66),Nylon6/6, Manufacturer URL=http://www.te.com, Mating Orientation=HorizontalwithBoard, Mounting Type=ThroughHole, Number of Levels=1, Other Names="5ULV-02B / A98076", Packaging=Bulk, Pitch="0.197\"(5.00mm)", Positions Per Level=2, Product Training Modules=Wire-to-BoardEurostyleTerminalBlocks, RoHS Information=282836-2StatementofCompliance, Screw Material - Plating=Brass-NickelPlated, Screw Thread=M3, Series=Buchanan, Torque - Screw=0.68Nm(6Lb-In), Wire Gauge=16-30AWG, Wire Termination=Screw-RisingCageClamp
K1 K2 K3 K4: library part CMP-03395-000121-1, "RELAY GEN PURPOSE SPST 30A 12V", Ambient Temperature Range High=+85°C, Ambient Temperature Range Low=-55°C, Coil Power=1W, Coil Resistance=144Ω, Coil Voltage=12V, Current Rating=30A, Manufacturer="TE Connectivity", Temperature="-55°C to +105°C", Temperature Range High=+105°C, Automotive=No, Category=Relay, Coil Type=Non-Latching, ComponentLink2Description=Datasheet, ComponentLink2URL=https://www.te.com/commerce/DocumentDelivery/DDEController?Action=showdoc&DocId=Customer+Drawing%7FT9AS1D22-12%7FG%7Fpdf%7FEnglish%7FENG_CD_T9AS1D22-12_G.pdf%7F1-1419104-7, Device Class L1=Electromechanical, Device Class L2=Relays, Device Class L3="Power Relays", Digikey Description="RELAY GEN PURPOSE SPST 30A 12V", Height=27.94mm, Lead Free=Yes, Manufacturer Part Number=T9AS1D22-12, Number Of Contacts=1, Octopart=https://octopart.com/t9as1d22-12-te+connectivity-46521723, Package=T9AS1D22-12, RoHS=TRUE, Switching Current=30A, Temperature Range Low=-55°C, Throw Configuration=SPST
K5 K6: library part CMP-1503-00243-1, "LZ Relays, 12 V Coil Voltage, 400 mW Nominal Operating Power, -40 to 85 degC, 8-Pin LZ, Carton, Case, RoHS", Coil Voltage="12 V", Manufacturer=Panasonic, Max Switching Current="16 A", Max Switching Voltage="440 V AC", Nominal Operating Power="400 mW", ComponentLink1Description="Manufacturer URL", ComponentLink1URL=http://www3.panasonic.biz/ac/ae/index.jsp, ComponentLink2Description=Datasheet, ComponentLink2URL=http://www3.panasonic.biz/ac/e_download/control/relay/power/catalog/mech_eng_lz.pdf?f_cd=300372, ComponentLink3Description="Package Specification", ComponentLink3URL=http://www3.panasonic.biz/ac/e_download/control/relay/power/catalog/mech_eng_lz.pdf?f_cd=300372, DatasheetVersion=201402-T, Electrical Life="1x10^5 (N.O.), 5x10^4 (N.C.)", Mechanical Life(Min.operation)=1x10^7, Mounting Technology="Through Hole", PackageDescription="8-Pin Through Hole Terminal Package, Body 28.8 x 12.5 mm", PackageReference=LZ-8-2880x1250x1570, PackageVersion="ASCTB203E, 02/2014", Packing="Carton, Case", PartNumber=ALZ11B12, Pb-Free=True, RoHS=True, Series="LZ Relays"
L1: library part CMP-14484-000032-1, "FIXED IND 15UH 1.4A 125 MOHM SMD", Case/Package=5030, Current Rating=1.4A, DC Resistance (DCR)=125mR, Inductance=15uH, Max DC Current=1.6A, Max Operating Temperature=120°C, Min Operating Temperature=-25°C, Package Quantity=1, Self Resonant Frequency=14MHz, Test Frequency=100kHz, Tolerance=20%, Core Material=Ferrite, Depth=4.9mm, Halogen Free="Halogen Free", Height=3mm, Height - Seated (Max)=0.118inch, Length=0.193inch, Mount="Surface Mount", Packaging="Tape and Reel", Radiation Hardening=No, RoHS Compliant=Yes, Saturation Current=1.6A, Shielding=Shielded, Termination=SMD/SMT, Width=0.193inch
L2 L3: library part CMP-0220-00185-1, "SMD EMI Suppression Ferrite Bead WE-CBF, Z = 30 Ohm", ComponentLink1Description="Manufacturer Link", ComponentLink1URL=http://www.we-online.com, ComponentLink2Description=Datasheet, ComponentLink2URL=http://www.we-online.de/katalog/media/pdf/742792601.pdf, DatasheetVersion=Dec-2005, Impedance="30 Ohm", PackageDescription="Chip Inductor, 2-Leads, Body 1.6 x 0.8 mm", PackageReference=SMD-0603, PackageVersion=2009
P1: library part CMP-1502-00948-1, "THT Vertical Pin Header WR-PHD, Pitch 1.27 mm, Dual Row, 10 pins", Contact Resistance=20mOhm, Manufacturer="Wurth Elektronik", Operating Temperature=-40to105degC, Rated Current=1A, Withstanding Voltage=500VAC, Working Voltage=100VAC, Datasheet URL=https://katalog.we-online.de/em/datasheet/62201021121.pdf, Gender=Male, Manufacturer URL=http://www.we-online.de, Mounting Technology=THT, Orientation=Vertical, Package Reference=62201021121, Packaging=Box, Part Number=62201021121, Pin Number=10, Pitch=1.27mm, Publisher=WurthElektronik, Row Number=Dual
P2: library part CMP-1502-01070-1, "THT Vertical Pin Header WR-PHD, Pitch 2.54 mm, Single Row, 6 pins", Contact Resistance=20mOhm, Manufacturer="Wurth Elektronik", Operating Temperature=-40to105degC, Rated Current=3A, Withstanding Voltage=500VAC, Working Voltage=250VAC, Datasheet URL=https://katalog.we-online.de/em/datasheet/6130xx11121.pdf, Gender=Male, Manufacturer URL=http://www.we-online.de, Mounting Technology=THT, Orientation=Vertical, Package Reference=61300611121, Packaging=Bag, Part Number=61300611121, Pin Number=6, Pitch=2.54mm, Publisher=WurthElektronik, Row Number=Single
Q1 Q2: library part CMP-2000-04931-2, "TRANS NPN 40V 0.2A SMD SOT23-3", Case/Package=SOT-23, Collector Base Voltage (VCBO)=60V, Collector Emitter Breakdown Voltage=40V, Collector Emitter Saturation Voltage=300mV, Continuous Collector Current=200mA, Emitter Base Voltage (VEBO)=6V, Frequency=300MHz, Max Operating Temperature=150°C, Max Power Dissipation=300mW, Min Operating Temperature=-55°C, Package Quantity=3000, Power Dissipation=350mW, Collector Emitter Voltage (VCEO)=40V, Contact Plating=Tin, Element Configuration=Single, Gain Bandwidth Product=300MHz, Height=1mm, hFE Min=100, Lead Free="Lead Free", Length=3.05mm, Max Breakdown Voltage=40V, Max Collector Current=200mA, Max Frequency=300MHz, Mount="Surface Mount", Number of Elements=1, Number of Pins=3, Packaging="Tape and Reel", Polarity=NPN, Radiation Hardening=No, REACH SVHC="No SVHC", Transition Frequency=300MHz, Voltage Rating (DC)=40V, Weight=0.000282oz, Width=1.4mm
R1 R2 R3 R4 R5 R6 R8 R9 R10 R11 R12 R13 R14 R15 R16 R19 R25 R29: library part CMP-1012-00623-3, "Chip Resistor, 10 KOhm, +/- 1%, 0.1 W, -55 to 155 degC, 0603 (1608 Metric), RoHS, Tape and Reel", Case Code (Imperial)=0603, Case Code (Metric)=1608, Manufacturer=Panasonic, Max Operating Temperature=155degC, Max Power Dissipation=100mW, Min Operating Temperature=-55degC, Package Description="2-Pin Surface Mount Device, Body 1.6 x 0.85 mm", Package Quantity=1, Package Reference=603, Resistance=10KOhm, Temperature Coefficient=100ppm\/degreesC, Tolerance=1%, Voltage Rating=75V, Case\/Package=0603, Composition=ThickFilm, Contact Plating=Tin, Datasheet URL=https://industrial.panasonic.com/cdbs/www-data/pdf/RDA0000/AOA0000C304.pdf, Datasheet Version=02/2017, Depth=0.8mm, Height=0.45mm, Lead Free=LeadFree, Length=1.6mm, Manufacturer URL=http://www.panasonic.com/, Military Standard=Not, Mount=SurfaceMount, Mounting Technology=SurfaceMount, Number of Pins=2, Number of Terminations=2, Packaging=TapeandReel, Power Rating=100mW, Radiation Hardening=No, REACH SVHC=NoSVHC, RoHSCompliant=true, Termination=SMD/SMT, Voltage Rating (DC)=75V, Width=0.031inch
R7 R18 R24: library part CMP-2001-04896-1, Manufacturer="Vishay Dale", Part Number=CRCW08050000Z0EA
R17 R20 R21 R23 R26 R27: library part CMP-2100-03681-2, "RES SMD 0 OHM JUMPER 1/4W 1206", Manufacturer=YAGEO, Manufacturer Part Number=RC1206JR-070RL, Package=RC1206, Power Rating=0.25W, Resistance=0Ω, Temperature="-55°C to +155°C", Temperature Coefficient=300ppm/°C, Temperature Range High=+155°C, Temperature Range Low=-55°C, Tolerance=5%, Voltage Rating=200V, Automotive=No, Category=Res, ComponentLink2Description=Datasheet, ComponentLink2URL=https://www.yageo.com/upload/media/product/productsearch/datasheet/rchip/PYu-RC_Group_51_RoHS_L_10.pdf, Composition="Thick Film", Device Class L1="Passive Components", Device Class L2=Resistors, Device Class L3="Chip SMD Resistors", Digikey Description="RES SMD 0 OHM JUMPER 1/4W 1206", Footprint Url=https://www.yageo.com/upload/website/yageo_PYu-R_Mount_10_19050818_343.pdf, Height=0.65mm, Ipc Land Pattern Name=RESC310160X55, Lead Free=Yes, Mouser Description="Resistor: thick film; SMD; 1206; 0O; 0.25W; ±5%; -55÷155°C", Octopart=https://octopart.com/rc1206jr-070rl-yageo-40025601, RoHS=TRUE, Series=RC
S: "Slide Switch SPDT Through Hole", Package=None, Availability=Unavailable, MF=C&K, MP=OS102011MS2QN1, Price=None, SnapEDA_Link=https://www.snapeda.com/parts/OS102011MS2QN1/C%26K/view-part/391519/?ref=snap
S1 S2: "Switch Tactile OFF (ON) SPST Round Button Gull Wing 0.05A 12VDC 1VA 1.57N SMD Loose Piece", Package="SMD-6 Omron Electronics", Availability=Good, Check_prices=https://www.snapeda.com/parts/3-1437566-8/TE%20Connectivity%20/%20AMP/view-part/292111/?ref=eda, EU_RoHS_Compliance=Compliant, MF="TE Connectivity / AMP", MP=3-1437566-8, Price=None, Purchase-URL=https://pricing.snapeda.com/search/part/3-1437566-8/?ref=eda, SnapEDA_Link=https://www.snapeda.com/parts/3-1437566-8/TE%20Connectivity%20/%20AMP/view-part/292111/?ref=snap
U1: library part CMP-04872-000011-1, "DGTL ISO 2.5KV 2CH I2C 8SOIC", Ambient Temperature Range High=+125°C, Ambient Temperature Range Low=-40°C, Manufacturer="Texas Instruments", Max Junction Temp=+136°C, Max Supply Voltage=5.5V, Min Supply Voltage=3V, Nominal Supply Current=1.7-3.1mA, Package=D0008A, Temperature="-40°C to +125°C", Automotive=No, Category=IC, ComponentLink2Description=Datasheet, ComponentLink2URL=http://www.ti.com/lit/ds/symlink/iso1540.pdf, Device Class L1="Integrated Circuits (ICs)", Device Class L2="Interface ICs", Device Class L3=unset, Digikey Description="DGTL ISO 2.5KV 2CH I2C 8SOIC", Height=1.75mm, Interface=I2C,SMBus,Other, Ipc Land Pattern Name=SOIC127P600X175-8, Lead Free=Yes, Manufacturer Part Number=ISO1540DR, Mouser Description="Digital Isolators Low-Power,Bidirec I2C Iso", Octopart=https://octopart.com/iso1540dr-texas+instruments-24334113, RoHS=TRUE, Standoff Height=0.11mm, Temperature Range High=+125°C, Temperature Range Low=-40°C
U2: library part CMP-12757-000006-1, "IC REG BUCK 3.3V 2A TSOT26", Ambient Temperature Range High=+85°C, Ambient Temperature Range Low=-40°C, Manufacturer="Diodes Inc.", Max Junction Temp=+160°C, Max Supply Voltage=32V, Min Supply Voltage=3.8V, Nominal Supply Current=22uA, Output Current=2A, Output Voltage=3.3V, Package=TSOT26, Switching Frequency=1.1MHz, Temperature="to +160°C", Automotive=No, Category=IC, ComponentLink2Description=Datasheet, ComponentLink2URL=https://www.diodes.com/assets/Datasheets/AP63200-AP63201-AP63203-AP63205.pdf, Device Class L1="Integrated Circuits (ICs)", Device Class L2="Power Management ICs", Device Class L3="Voltage Regulators - Switching", Digikey Description="IC REG BUCK 3.3V 2A TSOT26", Footprint Url=https://www.diodes.com/assets/Package-Files/TSOT26.pdf, Height=1mm, Lead Free=Yes, Manufacturer Part Number=AP63203WU-7, Mouser Description="AP63203 Series 3.3 V 2 A SMT Fixed Low IQ Synchronous Buck - TSOT-26", Number Of Outputs=1, Octopart=https://octopart.com/ap63203wu-7-diodes+inc.-98099550, Output Type=Fixed, RoHS=TRUE, Standoff Height=0.01mm, Switching Topology=Buck, Temperature Range High=+160°C
U3: library part CMP-2000-04952-1, "High-Voltage, High-Current Darlington Transistor Array, 0.5 A, 50 V, -20 to 70 degC, 16-Pin SOIC (D16), Green (RoHS & no Sb/Br), Tube", Manufacturer=TexasInstruments, Maximum Collector Emitter Saturation Voltage=1.1@100mA, Maximum Collector Emitter Voltage=50V, Package=16SOIC, Package Description="16-Pin Plastic Small Outline, Body 9.9 x 3.9 mm, Pitch 1.27 mm", Package Reference=D16, Package Version="4040047-6/M, 06/2011", Peak DC Collector Current=0.5A, Category=DarlingtonBJT, Configuration=Array7, Datasheet URL=http://www.ti.com/general/docs/lit/getliterature.tsp?genericPartNumber=uln2003a&fileType=pdf, Datasheet Version="Rev. O, 01/2016", Manufacturer URL=http://www.ti.com/, Mounting=SurfaceMount, Package URL=http://www.ti.com/lit/ml/mpds178g/mpds178g.pdf, Packaging=Rail/Tube, Type=NPN
U4: library part CMP-0537-00067-1, "ARM Cortex-M4 32-bit MCU, 16 KB Flash, 16 KB Internal RAM, 37 I/Os, 48-Pin LQFP, -40 to 85 degC, Tray", I/Os (High Current)=37, Operating Frequency(F) (Processor speed) (MHz)=72, Package Description="48-Pin Low Profile Quad Flat Package, Body 7 x 7 mm, Pitch 0.5 mm", Package Reference=LQFP48, Supply Voltage(Vcc) min (V)=2, ComponentLink1Description="Manufacturer URL", ComponentLink1URL=http://www.st.com/, ComponentLink2Description=Datasheet, ComponentLink2URL=http://www.st.com/st-web-ui/static/active/en/resource/technical/document/datasheet/DM00097745.pdf, Core="ARM Cortex-M4", D/A Converter=3, DatasheetVersion="Rev. 4", FLASH Size (Prog) (kB)=16, Internal RAM Size (kB)=16, Mounting Technology="Surface Mount", Packing=Tray
U5 U6: library part 4N35SM, "Transistor Output Optocouplers PHOTO TRANS", Package=None, Arrow_Electronics-Purchase-URL=https://snapeda.com/shop?store=Arrow+Electronics&id=4834122, Availability=Good, DigiKey-Purchase-URL=https://snapeda.com/shop?store=DigiKey&id=4834122, MF="ON Semiconductor / Fairchild", Mouser-Purchase-URL=https://snapeda.com/shop?store=Mouser&id=4834122, MP=4N35SM, Price=None, SnapEDA_Link=https://www.snapeda.com/parts/4N35SM/Fairchild%20Semiconductor/view-part/4834122/?ref=snap
U20: library part Buck_Module, "FP for drop in 3.3 V buck"
X1: library part CMP-0277-00002-1, "Low Profile Surface Mount Microprocessor Crystal, 4.096 MHz +/-30 ppm, 180 Ohm, -40 to 85 degC, 2-Pin 11.4 x 4.7 x 3.3 mm SMD, RoHS, Tape and Reel", Freq. Stability="+/- 30 ppm", Frequency="4.096 MHz", Load Capacitance="18 pF", Manufacturer=Abracon, Operating Temp. Range="-40 to 85 degC", PartNumber=ABLS2-4.096MHZ-D4Y-T, Shunt Capacitance="7 pF Max.", ComponentLink1Description="Manufacturer URL", ComponentLink1URL=http://www.abracon.com/, ComponentLink2Description=Datasheet, ComponentLink2URL=http://www.abracon.com/Resonators/ABLS2.pdf, DatasheetVersion="Rev. 03.31.11", ESR="180 Ohm", Freq. Tolerance="+/- 30 ppm", Mounting Technology="Surface Mount", Operation Mode="Fundamental or 3rd Overtone", PackageDescription="2-Pin SMD, Body 11.4 x 4.7 mm, Height 3.3 mm", PackageReference=ABLS2-2, Packing="Tape and Reel", RoHS=TRUE

## Free pads (board coordinates)
  round 188.98 hole 110.24: 13(6158.66,218.5)
  round 188.98 hole 118.11: 14(6158.66,3718.5)

## Via types
v1: diameter 15.75, hole 7.87, Top Layer to Bottom Layer, 36 vias

## Nets (pads, with @x,y where several pads share a name; then routed paths per layer and width w, separated by ;. In a path a pad name is that pad's centre, name@x,y a point inside that pad or via, vN(x,y) a via of type N, cw(c..) or ccw(c..) an arc to the next point about the centre after c; other vN are vias at no path point)
+3.3: C2.1 C6.2 C7.2 C29.1 C30.1 L1.2 L2.1 P1.1 P2.2 P2.3 R3.2 R12.2 R16.2 R19.2 R25.2 R29.2 U1.8 U2.1 U20.4 U20.5 | length 932.2
  Top Layer w50: P2.3 787.07,3719.36 ; R16.2 787.07,3534 787.07,3719.36 ; 787.07,3534.25 837.75,3534.25 871,3501 993,3501 ; P2.2 787.07,3719.36 ; C7.2 1350,3412.01 1354.53,3407.48 L1.2 1445.47,3407.48 1450,3412.01 C6.2 1538.08,3485.43 L2.1
+12: D2.1 D7.2 D9.1 D13.1 D17.1 D19.1 D21.1 K1.A1 K2.A1 K3.A1 K4.A1 K5.8 K6.8 R1.2 R2.2 R6.2 R8.2 R10.2 R14.2 R15.2 U2.2 U2.3 U3.9 U20.1 U20.3
  other v1: 887,3075 965.74,3075 1123.22,3075 1201.96,3075 1280.7,3075 1359.44,3075 926.37,3153.74 1005.11,3153.74 1083.85,3153.74 1162.59,3153.74 1241.33,3153.74 1320.07,3153.74 1398.81,3153.74 1477.55,3153.74
AGND: C8.2 C9.2 C21.2 C22.2 C23.2 C24.1 D6.1 R7.2 U4.8 | length 378.7
  Top Layer w10: U4.8 1099.53,1900.47 1231.57,1768.43 C23.2
AVCC: C8.1 C9.1 C21.1 C22.1 C23.1 C24.2 L3.2 R5.2 U4.9 | length 315.1
  Top Layer w10: U4.9 1119.56,2019.38 1119.56,1930.44 1218.43,1831.57 C23.1
DVCC: C4.1 C5.1 C14.1 C15.1 C16.1 C17.1 C18.2 C19.1 C20.1 D11.1 L2.2 L3.1 R4.2 S.2 U4.1 U4.24 U4.36 U4.48 | length 1313.5
  Top Layer w10: C20.1 803.3,2081.73 U4.48 ; C15.1 848.43,2411.57 899.72,2360.28 U4.36 ; C19.1 908.58,1940 961.73,1993.15 U4.1 ; U4.24 1261.01,2298.27 1261.85,2299.1 1261.85,2371.85 1273.14,2383.14 C16.1
  Bottom Layer w100: 1563,2700.52 1563,3378
  other v1: 1548,3224.48 1548,3254.99 1583,3282.42 1548,3285.49 1583,3314.28 1548,3315.99 1548,3346.5 1583,3346.14 1548,3377 1583,3378
GND: C2.2 C4.2 C5.2 C6.1 C7.1 C10.2 C11.2 C12.2 C13.2 C14.2 C15.2 C16.2 C17.2 C18.1 C19.2 C20.2 D3.1 D4.1 D5.1 D10.2 D11.2 D14.1 D15.1 J1.A31 J1.C31 J3.1 P1.3 P1.5 P1.9 R7.1 R13.1 S1.3 S1.4 S2.3 S2.4 U1.5 U2.4 U3.8 U4.23 U4.35 U4.47 U5.4 U6.4 U20.2 U20.6 | length 2340.9
  Top Layer w10: C20.2 792.8,2128.77 821.23,2128.77 827.09,2122.91 827.09,2107.28 832.95,2101.42 U4.47 ; C15.2 926.49,2445.08 974.92,2445.08 981.42,2438.58 U4.35 ; U4.23 1302.45,2278.58 1340,2316.14 C16.2 C17.2 1470,2320 1491.97,2341.97 C14.2 1584.14,2341.97 1600,2326.11 1600,2305.86 1605.86,2300 1643.81,2300 C18.1
  Top Layer w20: U2.4 1099.19,3299.21 1152.66,3245.75 1153.78,3245.75 D3.1
  Top Layer w50: J1.A31 J1.C31 410.39,3418.27 595.04,3418.27 D10.2 ; v1(518,3094) 518.86,3093.14 518.86,3011.69 S1.3 S1.4 522,2650.28 v1(522,2565) v1@702,2565 ; S2.4 699.72,2480.83 699.72,2562.72 v1@702,2565 ; v1(703,2566) v1@702,2565 ; D4.1 1240,3699 1241,3700 ; C7.1 1350,3702 1353,3705 ; C6.1 1450,3709 1451,3710
  other v1: 1185.52,3770 1264.26,3770 1343,3770 1421.74,3770 1500.48,3770 1224.89,3848.74 1303.63,3848.74 1382.37,3848.74 1539.85,3848.74
GND1: C1.2 J1.A7 J1.C7 U1.4
Interlock: J3.2 U4.12
L1: J.5 J.6 K1.B2 R17.1
L1_out: J.7 J.8 K1.B1
L2: J4.7 J4.8 K3.B2 R23.1
L2_out: J4.5 J4.6 K3.B1
N1: J.9 J.10 K2.B2 R20.1
N1_out: J.11 J.12 K2.B1
N2: J4.3 J4.4 K4.B2 R26.1
N2_out: J4.1 J4.2 K4.B1
NetC3_1: C3.1 U2.6 | length 109.1
  Top Layer w20: U2.6 1096.2,3371.1 1197.08,3371.1 C3.1
NetC3_2: C3.2 L1.1 U2.5 | length 336.1
  Top Layer w20: U2.5 1133.39,3336.61 1164.96,3305.04 C3.2
  Top Layer w50: C3.2 1250.96,3305.04 1287.96,3268.04 1397.71,3268.04 L1.1
NetC12_1: C12.1 U4.6 X1.2 | length 791.9
  Top Layer w10: U4.6 1060.16,1706.85 1186.53,1580.48 1186.53,1566.34 1222.87,1530 X1.2 1238.43,1528.58 C12.1
NetC13_1: C13.1 U4.5 X1.1 | length 792.1
  Top Layer w10: C13.1 862.99,1311.42 X1.1 877.13,1530 913.47,1566.34 913.47,1580.48 1040.47,1707.48 U4.5
NetC25_1: C25.1 D27.1 Q1.2
NetC25_2: C25.2 D24.2 D25.2 R18.1 R21.2
NetC26_1: C26.1 D24.1 D28.2 R17.2
NetC26_2: C26.2 D25.1 D26.2 R20.2
NetC27_1: C27.1 D34.1 Q2.2
NetC27_2: C27.2 D31.2 D32.2 R24.1 R27.2
NetC28_1: C28.1 D31.1 D37.2 R23.2
NetC28_2: C28.2 D32.1 D33.2 R26.2
NetC29_2: C29.2 C30.2 P2.1 | length 270.8
  Top Layer w50: C29.2 850.57,3663 C30.2 857.78,3670.21 P2.1
NetD1_1: D1.1 D2.2 D8.1 D9.2 K1.A2 K2.A2 U3.16
NetD1_2: D1.2 R1.1
NetD3_2: D3.2 R2.1 | length 40.5
  Top Layer w20: R2.1 D3.2
NetD4_2: D4.2 R3.1
NetD5_2: D5.2 R4.1
NetD6_2: D6.2 R5.1
NetD7_1: D7.1 F1.2 | length 151.4
  Top Layer w50: F1.2 882.87,3433.27 886.22,3436.61 D7.1
NetD8_2: D8.2 R6.1
NetD12_1: D12.1 D13.2 D16.1 D17.2 K3.A2 K4.A2 U3.15
NetD12_2: D12.2 R8.1
NetD14_2: D14.2 R9.1 | length 124.9
  Top Layer w20: D14.2 R9.1
NetD15_2: D15.2 R11.1 | length 124.9
  Top Layer w20: D15.2 R11.1
NetD16_2: D16.2 R10.1
NetD18_1: D18.1 D19.2 K5.1 U3.14
NetD18_2: D18.2 R14.1
NetD20_1: D20.1 D21.2 K6.1 U3.13
NetD20_2: D20.2 R15.1
NetD26_1: D26.1 D27.2 D28.1 Q1.1 R21.1
NetD33_1: D33.1 D34.2 D37.1 Q2.1 R27.1
NetJ4_9: J4.9 J4.10
NetJ4_11: J4.11 J4.12
NetJ_1: J.1 J.2
NetJ_3: J.3 J.4
NetQ1_3: Q1.3 U5.2
NetQ2_3: Q2.3 U6.2
NetR9_2: R9.2 U4.42
NetR11_2: R11.2 U4.43
NetR13_2: R13.2 S.1 U4.44
NetR18_2: R18.2 U5.1
NetR24_2: R24.2 U6.1
NRST: C11.1 P1.10 S2.1 S2.2 U4.7 | length 575
  Top Layer w10: S2.2 S2.1 520,1980 540,1960 C11.1
R1: U3.1 U4.45
R2: U3.2 U4.46
R3: U3.3 U4.21
R4: U3.4 U4.22
S1_COM: J2.5 J2.6 K5.3 K5.6
S1_NC: J2.1 J2.2 K5.2 K5.7
S1_NO: J2.3 J2.4 K5.4 K5.5
S2_COM: J2.11 J2.12 K6.3 K6.6
S2_NC: J2.7 J2.8 K6.2 K6.7
S2_NO: J2.9 J2.10 K6.4 K6.5
SCL: P2.6 R16.1 U1.6 U4.38 | length 199.9
  Top Layer w20: P2.6 615.22,3507.22 642,3534 R16.1
SCL1: J1.A5 J1.C5 U1.3
SDA: P1.4 P2.4 R29.1 U1.7 U4.37
SDA1: J1.A3 J1.C3 U1.2
START: C10.1 R12.1 S1.1 S1.2 U4.33 | length 189.6
  Top Layer w10: S1.2 C10.1@804.06,2650.87 ; R12.1 800,2654.92 C10.1@804.06,2650.87 ; C10.1 814.92,2640 C10.1@804.06,2650.87
SWDIO: P1.2 P2.5 U4.34
VCC: D10.1 F1.1 J1.A29 J1.C29 | length 576.9
  Top Layer w50: J1.A29 J1.C29 411.11,3216.54 461.58,3267 583,3267 583.66,3266.34 589.57,3266.34 600,3255.91 D10.1 605.02,3244.98 744.98,3244.98 F1.1
VCC1: C1.1 J1.A1 J1.C1 U1.1
ZCD1: R19.1 U4.10 U5.5
ZCD2: R25.1 U4.11 U6.5
pads on no net: J1.A9 J1.A11 J1.A13 J1.A15 J1.A17 J1.A19 J1.A21 J1.A23 J1.A25 J1.A27 J1.C9 J1.C11 J1.C13 J1.C15 J1.C17 J1.C19 J1.C21 J1.C23 J1.C25 J1.C27 J1.MH1 J1.MH2 P1.6 P1.7 P1.8 S. S.3 U3.5 U3.6 U3.7 U3.10 U3.11 U3.12 U4.2 U4.3 U4.4 U4.13 U4.14 U4.15 U4.16 U4.17 U4.18 U4.19 U4.20 U4.25 U4.26 U4.27 U4.28 U4.29 U4.30 U4.31 U4.32 U4.39 U4.40 U4.41 U5.3 U5.6 U6.3 U6.6

## Polygon pours and split planes (outlines as drawn)
DVCC on Bottom Layer "DVCC_L04_P004" (solid, pour order 4): 762,2619 762,1690 1898,1690 1898,1800 1898,2739 786,2739 762,2739
DVCC on Top Layer "DVCC_L01_P005" (solid, pour order 5): 1523,3442 1525,3440 1525,3095 1618.86,3095 1629.6,3105.74 1629.6,3264.6 1649.53,3284.53 1649.53,3352.4 1662.3,3365.17 1662.3,3412.38 1610.62,3412.38 1598.32,3424.68 1598.32,3443.87
GND on Top Layer "GND_L01_P003" (solid, pour order 3): 1145,3665 1591,3665 1591,3905 1587,3909 1144,3909
+3.3 on Top Layer "+3.3_L01_P002" (solid, pour order 2): 1413.39,3350 1503,3350 1503,3535 1297,3535 1262,3500 1190,3500 1131,3559 1131,3907 1001,3907 975,3881 975,3364 979,3360 1032,3360 1073,3401 1269,3401 1320,3350